# Altium PCB DWM1000Breakout.PcbDoc
Units mil, origin at the board's own origin, x right, y up, seen from the top; angles counter-clockwise.
Board outline 2560 x 1183 mil, 2 copper layers (Component Side, Bottom Layer), stack 61.4 mil thick; 27 components, 39 nets, 128 pads, 24 vias.
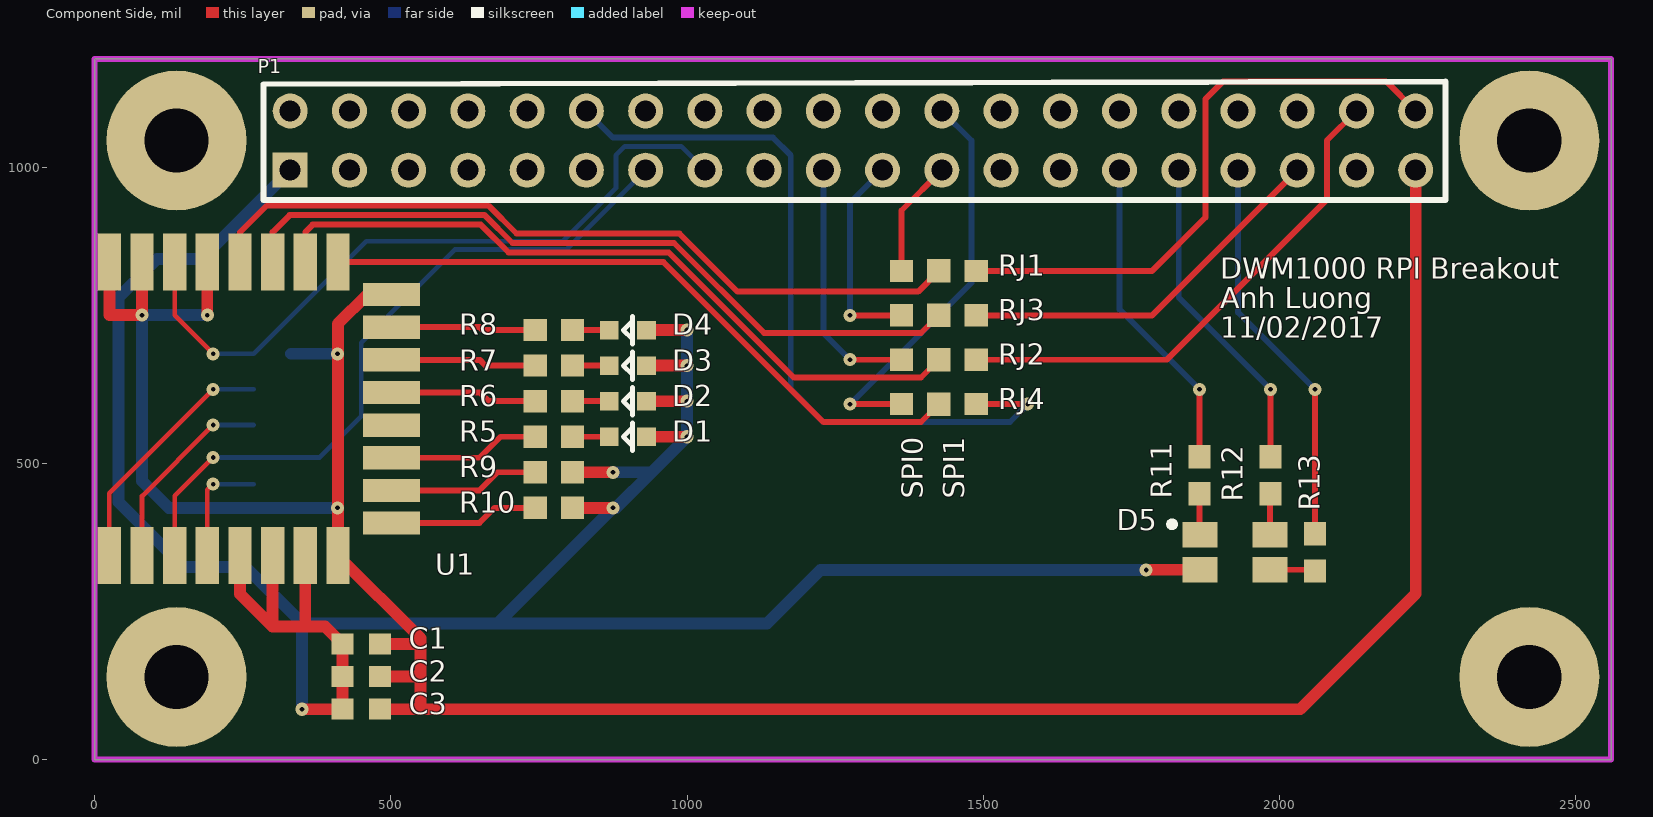
[diagram p0: Component Side view]
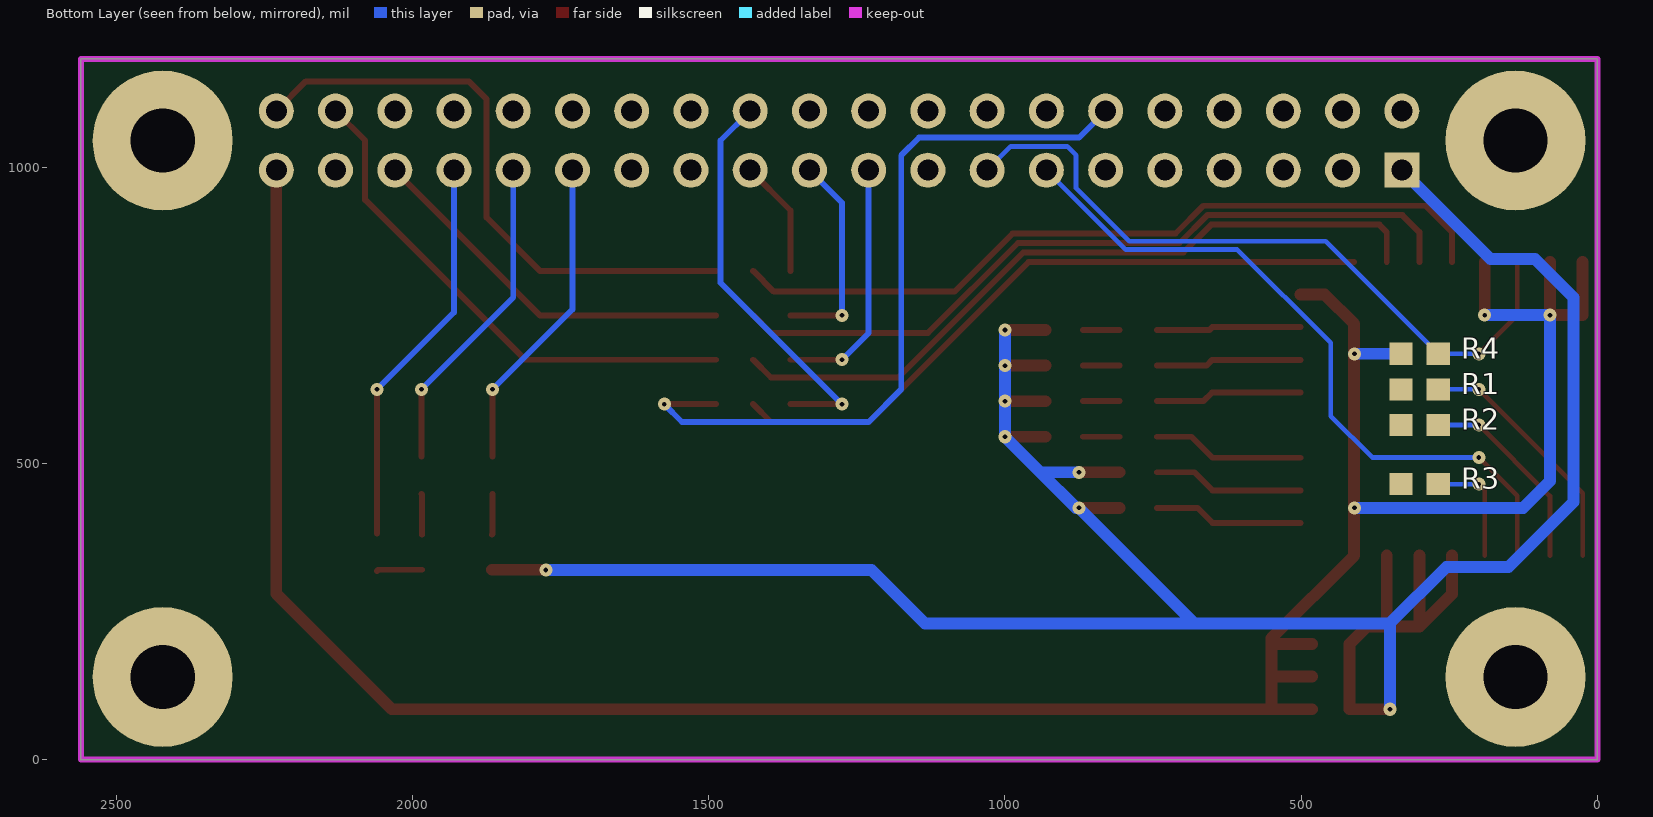
[diagram p1: Bottom Layer view, seen from below]

## Layer stack, top to bottom
Top Solder: solder mask 0.4, Solder Resist, Dk 3.5
Component Side: signal copper 1.7
Dielectric 1: core 58, FR-4, Dk 4.2
Bottom Layer: signal copper 1.7
Solder Side: solder mask 0.4, Solder Resist, Dk 3.5

## Board outline
0,0 0,1183 2560,1183 2560,0

## Design rules (kind name [scope] priority, off if disabled: settings)
Clearance [InNetClass('RF')] p1: gap=20 ignorepadtopadclearanceinfootprint=FALSE
Clearance "Clearance~Sunstone Circuits" [All] p2: gap=6 ignorepadtopadclearanceinfootprint=FALSE except(0: Arc-Hole Track-Hole SMDPad-Hole THPad-Hole Via-Hole Fill-Hole Poly-Hole Region-Hole Text-Hole) // Sunstone Circuits Minimum Clearance Rule (MLB~4&6 Layer Designs)
HoleSize "HoleSize~Sunstone Circuits" [All] p1: absolutevalues=TRUE maxlimit=251 minlimit=8 maxpercent=80.000 minpercent=20.000 // Sunstone Circuits Hole Size Rule (MLB~4&6 Layer Designs)
HoleSize Testpoint [All] p2: absolutevalues=TRUE maxlimit=100 minlimit=1 maxpercent=80.000 minpercent=20.000
HoleSize TestPointUsage [All] p3: absolutevalues=TRUE maxlimit=100 minlimit=1 maxpercent=80.000 minpercent=20.000
MinimumAnnularRing "MinimumAnnularRing~Sunstone Circuits" [All] p1: minimumring=7 // Sunstone Circuits Minimum Annular Ring (MLB~4&6 Layer Designs)
PlaneClearance "PlaneClearance~Sunstone Circuits" [All] p1: clearance=12 // Sunstone Circuits Power Plane Clearance Rule (MLB~4&6 Layer Designs)
PlaneConnect "PlaneConnect~Sunstone Circuits" [All] p1: planeconnectstyle=Relief reliefexpansion=10 reliefentries=4 reliefconductorwidth=8 reliefairgap=10 // Sunstone Circuits Power Plane Connect Rule (MLB~4&6 Layer Designs)
PolygonConnect [IsVia] p1: thpad.connectstyle=Direct thpad.reliefconductorwidth=10 thpad.reliefentries=4 thpad.polygonreliefangle="90 Angle" thpad.airgapwidth=10 smdpad.connectstyle=Relief smdpad.reliefconductorwidth=10 smdpad.reliefentries=4 smdpad.polygonreliefangle="90 Angle" smdpad.airgapwidth=10 via.connectstyle=Direct via.reliefconductorwidth=10 via.reliefentries=4 via.polygonreliefangle="90 Angle" via.airgapwidth=10
PolygonConnect "PolygonConnect~Sunstone Circuits" [All] p2: connectstyle=Relief reliefconductorwidth=8 reliefentries=4 polygonreliefangle="90 Angle" airgapwidth=10 // Sunstone Circuits Polygon Connect Style (MLB~4&6 Layer Designs)
RoomDefinition DWM1000Breakout [InComponentClass('DWM1000Breakout')] p1: confinementstyle=ConfineIn formatcopy=TRUE lockcomponents=FALSE outline -2000,-3000 0,-3000 0,-2000 -2000,-2000
RoutingVias "RoutingVias~Sunstone Circuits" [All] p1: holewidth=16 width=30 viastyle="Through Hole" minholewidth=8 minwidth=22 maxholewidth=20 maxwidth=40 // Sunstone Circuits Routing Vias Rule (MLB~4&6 Layer Designs)
ShortCircuit "ShortCircuit~Sunstone Circuits" [All] p1: allowed=FALSE // Sunstone Circuits Short Circuit Rule~Do Not Allow (MLB~4&6 Layer Designs)
SolderMaskExpansion "SolderMaskExpansion~Sunstone Circuits" [All] p1: expansion=3 // Sunstone Circuits Solder Mask Expansion Rule (MLB~4&6 Layer Designs)
ViasUnderSMD "ViasUnderSMD~Sunstone Circuits" [All] p1: allowed=FALSE // Sunstone Circuits Vias Under SMD~Do Not Allow (MLB~4&6 Layer Designs)
Width [InNetClass('RF')] p1: maxlimit=16.4 minlimit=16.4 preferedwidth=16.4 impedancedriven=TRUE minimp=50.000000 maximp=50.000000 favimp=50.000000
Width "Width~Sunstone Circuits" [All] p2: maxlimit=100 minlimit=6 preferedwidth=10 // Sunstone Circuits Minimum Width Rule (MLB~4&6 Layer Designs)
26 further rules are at their usual default settings.

## Components (designator, comment, footprint, x,y, rotation, side; value= is the part's Value field where it differs from the comment)
C1 "GRM188R60J106ME47D" "CAPC1608X08N (0603)" 450,195 r180 top
C2 "GRM188R61A105KA61D" "CAPC1608X08N (0603)" 450,140 r180 top
C3 "GRM188R71C104KA01D" "CAPC1608X08N (0603)" 450,85 r180 top
D1 "LG Q971-KN-1" CHIPLED0603 900,545 r180 top
D2 "LG Q971-KN-1" CHIPLED0603 900,605 r180 top
D3 "LG Q971-KN-1" CHIPLED0603 900,665 r180 top
D4 "LG Q971-KN-1" CHIPLED0603 900,725 r180 top
D5 "CLV1A-FKB-CJ1M1F1BB7R4S3" "CREE LV1" 1925,350 r0 top
P1 "Raspbery Pi Zero Mate" "Raspberry Pi Zero" 1280,1045 r270 top locked
R1 "MCR03ERTJ000" "RESC1608X06N (0603)" 300,625 r180 bottom
R2 "MCR03ERTJ000" "RESC1608X06N (0603)" 300,565 r180 bottom
R3 "MCR03ERTJ000" "RESC1608X06N (0603)" 300,465 r180 bottom
R4 "MCR03ERTJ103" "RESC1608X06N (0603)" 300,685 r180 bottom
R5 "MCR03ERTJ331" "RESC1608X06N (0603)" 775,545 r180 top
R6 "MCR03ERTJ331" "RESC1608X06N (0603)" 775,605 r180 top
R7 "MCR03ERTJ331" "RESC1608X06N (0603)" 775,665 r180 top
R8 "MCR03ERTJ331" "RESC1608X06N (0603)" 775,725 r180 top
R9 "MCR03ERTJ000" "RESC1608X06N (0603)" 775,485 r0 top
R10 "MCR03ERTJ000" "RESC1608X06N (0603)" 775,425 r0 top
R11 "MCR03ERTJ331" "RESC1608X06N (0603)" 1865,480 r270 top
R12 "MCR03ERTJ331" "RESC1608X06N (0603)" 1985,480 r90 top
R13 "MCR03ERTJ331" "RESC1608X06N (0603)" 2060,350 r90 top
RJ1 "R_J" RJ 1425,825 r0 top value=DNP
RJ2 "R_J" RJ 1425,675 r0 top value=DNP
RJ3 "R_J" RJ 1425,750 r0 top value=DNP
RJ4 "R_J" RJ 1425,600 r0 top value=DNP
U1 "DWM1000" DWM1000 509.02,336.26 r90 top

## Footprints (in the part's own frame and the unit in brackets; to place one, negate y for a bottom-side part, rotate by r counter-clockwise, add the part's x,y. Pads: shape width x height; smd on the part's side, far side on the other; paste and mask are expansions set on the pad)
"CAPC1608X08N (0603)" [mm] "Chip Capacitor, 2-Leads, Body 1.60x0.80mm, IPC Medium Density"
  rect 0.95x0.9 smd: 1(-0.8,0) 2(0.8,0)
  body extent -0.85,-0.45 0.85,0.45, height 0.8
CHIPLED0603 [mm]
  rect 0.8x0.8 smd: 1(-0.8,0) 2(0.8,0)
  silkscreen extent -0.2,-0.6 0.2,0.6, body extent -0.81,-0.4 0.81,0.4, height 0.6
"CREE LV1" [mm]
  rect 1.5x1.1 smd: 1(-1.5,0.75) 2(-1.5,-0.75) 3(1.5,-0.75) 4(1.5,0.75)
  silkscreen extent -2.82,1.08 -2.57,1.32, body extent -1.75,-1.4 1.75,1.4, height 1.9
DWM1000 [mm]
  rect 2.45x1 smd: 1(0.205,12.3) 2(0.205,10.9) 3(0.205,9.5) 4(0.205,8.1) 5(0.205,6.7) 6(0.205,5.3) 7(0.205,3.9) 8(0.205,2.5) 17(12.795,2.5) 18(12.795,3.9) 19(12.795,5.3) 20(12.795,6.7) 21(12.795,8.1) 22(12.795,9.5) 23(12.795,10.9) 24(12.795,12.3)
  rect 1x2.45 smd: 9(1.6,0.205) 10(3,0.205) 11(4.4,0.205) 12(5.8,0.205) 13(7.2,0.205) 14(8.6,0.205) 15(10,0.205) 16(11.4,0.205)
  body extent 0,-0.01 13,22.99, height 2.9
"Raspberry Pi Zero" [mm] "Raspberry Pi Zero Header and Layout"
  round 6 hole 2.75 unplated mask+2: 0(0,29) 0(0,-29) 0(23,29) 0(23,-29)
  rect 1.5x1.5 hole 0.9: 1(1.27,-24.13)
  round 1.5 hole 0.9: 2(-1.27,-24.13) 3(1.27,-21.59) 4(-1.27,-21.59) 5(1.27,-19.05) 6(-1.27,-19.05) 7(1.27,-16.51) 8(-1.27,-16.51) 9(1.27,-13.97) 10(-1.27,-13.97) 11(1.27,-11.43) 12(-1.27,-11.43) 13(1.27,-8.89) 14(-1.27,-8.89) 15(1.27,-6.35) 16(-1.27,-6.35) 17(1.27,-3.81) 18(-1.27,-3.81) 19(1.27,-1.27) 20(-1.27,-1.27) 21(1.27,1.27) 22(-1.27,1.27) 23(1.27,3.81) 24(-1.27,3.81) 25(1.27,6.35) 26(-1.27,6.35) 27(1.27,8.89) 28(-1.27,8.89) 29(1.27,11.43) 30(-1.27,11.43) 31(1.27,13.97) 32(-1.27,13.97) 33(1.27,16.51) 34(-1.27,16.51) 35(1.27,19.05) 36(-1.27,19.05) 37(1.27,21.59) 38(-1.27,21.59) 39(1.27,24.13) 40(-1.27,24.13)
  silkscreen extent -2.54,-25.27 2.54,25.4, body extent -3.6,-32.53 27.65,33.37, height 10.64
"RESC1608X06N (0603)" [mm] "Chip Resistor, 2-Leads, Body 1.60x0.80mm, IPC Medium Density"
  rect 1x0.95 smd: 1(-0.8,0) 2(0.8,0)
  body extent -0.85,-0.45 0.85,0.45, height 0.55
RJ [mm] "0 Ohm Resistor Jumper"
  rect 1x1 smd: 1(0,0)
  rect 1x0.95 smd: 2(-1.6,0) 3(1.6,0)
  round 0.5 on Top Overlay: 5(-2.475,-0.825)
  body extent -1.35,-0.45 1.65,0.45, height 0.55

## Part data
C1: "CAP CER 10UF 6.3V 20% X5R 0603", Capacitance=10µF, Manufacturer="Murata Electronics North America", Operating Temperature="-55°C ~ 85°C", Package / Case="0603 (1608 Metric)", Ratings=-, Temperature Coefficient=X5R, Tolerance=±20%, Voltage - Rated=6.3V, Applications="General Purpose", Category=Capacitors, ComponentLink1Description=http://search.murata.co.jp/Ceramy/image/img/A01X/G101/ENG/GRM188R60J106ME47-01.pdf, ComponentLink1URL=http://search.murata.co.jp/Ceramy/image/img/A01X/G101/ENG/GRM188R60J106ME47-01.pdf, Features=-, Height - Seated (Max)=-, Lead Spacing=-, Lead Style=-, Manufacturer Part Number=GRM188R60J106ME47D, Mounting Type="Surface Mount, MLCC", Packaging=Digi-Reel®, Pricing 1="1=0.24, 10=0.2, 50=0.1126, 100=0.1, 250=0.075, 500=0.06626, 1000=0.05875 (USD)", RoHS="RoHS Compliant", Size / Dimension="0.063\" L x 0.031\" W (1.60mm x 0.80mm)", Stock 1=2128324, Supplier 1=Digi-Key, Supplier 2=Digi-Key, Thickness (Max)="0.035\" (0.90mm)"
C2: "CAP CER 1UF 10V 10% X5R 0603", Capacitance=1.0µF, Manufacturer="Murata Electronics North America", Operating Temperature="-55°C ~ 85°C", Package / Case="0603 (1608 Metric)", Ratings=-, Temperature Coefficient=X5R, Tolerance=±10%, Voltage - Rated=10V, Applications="General Purpose", Category=Capacitors, ComponentLink1Description=http://search.murata.co.jp/Ceramy/image/img/A01X/G101/ENG/GRM188R61A105KA61-01.pdf, ComponentLink1URL=http://search.murata.co.jp/Ceramy/image/img/A01X/G101/ENG/GRM188R61A105KA61-01.pdf, Features=-, Height - Seated (Max)=-, Lead Spacing=-, Lead Style=-, Manufacturer Part Number=GRM188R61A105KA61D, Mounting Type="Surface Mount, MLCC", Packaging="Cut Tape (CT)", Pricing 1="1=0.1, 10=0.041, 50=0.0224, 100=0.019, 250=0.01552, 500=0.01328, 1000=0.01035 (USD)", RoHS="RoHS Compliant", Size / Dimension="0.063\" L x 0.031\" W (1.60mm x 0.80mm)", Stock 1=244919, Supplier 1=Digi-Key, Thickness (Max)="0.035\" (0.90mm)"
C3: "CAP CER 0.1UF 16V 10% X7R 0603", Capacitance=0.1µF, Manufacturer="Murata Electronics North America", Operating Temperature="-55°C ~ 125°C", Package / Case="0603 (1608 Metric)", Ratings=-, Temperature Coefficient=X7R, Tolerance=±10%, Voltage - Rated=16V, Applications="General Purpose", Category=Capacitors, ComponentLink1Description=http://search.murata.co.jp/Ceramy/image/img/A01X/G101/ENG/GRM188R71C104KA01-01.pdf, ComponentLink1URL=http://search.murata.co.jp/Ceramy/image/img/A01X/G101/ENG/GRM188R71C104KA01-01.pdf, Features=-, Height - Seated (Max)=-, Lead Spacing=-, Lead Style=-, Manufacturer Part Number=GRM188R71C104KA01D, Mounting Type="Surface Mount, MLCC", Packaging="Cut Tape (CT)", Pricing 1="1=0.1, 10=0.019, 50=0.0102, 100=0.0086, 250=0.00704, 500=0.006, 1000=0.00468 (USD)", RoHS="RoHS Compliant", Size / Dimension="0.063\" L x 0.031\" W (1.60mm x 0.80mm)", Stock 1=1458181, Supplier 1=Digi-Key, Thickness (Max)="0.035\" (0.90mm)"
D1 D2 D3 D4: "LED CHIPLED 570NM GREEN 0603 SMD", Color=Green, Current - Test=20mA, Luminous Flux @ Current - Test=-, Manufacturer="OSRAM Opto Semiconductors Inc", Millicandela Rating=10mcd, Package / Case="0603 (1608 Metric)", Voltage - Forward (Vf) Typ=2.2V, Category=Optoelectronics, ComponentLink1Description=http://catalog.osram-os.com/catalogue/catalogue.do;jsessionid=DE4D071D0D2758CC117C711BF848053E?act=downloadFile&favOid=0200000600005069000100b6, ComponentLink1URL=http://catalog.osram-os.com/catalogue/catalogue.do;jsessionid=DE4D071D0D2758CC117C711BF848053E?act=downloadFile&favOid=0200000600005069000100b6, Height=0.80mm, Lens Style/Size="Rectangle with Flat Top, 1mm x 0.8mm", Lens Type=Diffused, Manufacturer Part Number="LG Q971-KN-1", Mounting Type="Surface Mount", Packaging="Tape & Reel (TR)", Pricing 1="4000=0.03632 (USD)", RoHS="RoHS Compliant", Size / Dimension="1.60mm L x 0.80mm W", Stock 1=44000, Supplier 1=Digi-Key, Viewing Angle=160°, Wavelength - Dominant=570nm, Wavelength - Peak=572nm
D5: "LED RED/GREEN/BLUE PLCC4 SMD", Color="Red, Green, Blue (RGB)", Current - Test=20mA, Luminous Flux @ Current - Test=-, Manufacturer="Cree Inc", Millicandela Rating="675mcd Red, 1055mcd Green, 337mcd Blue", Package / Case=4-PLCC, Voltage - Forward (Vf) (Typ)="2V Red, 3.2V Green, 3.2V Blue", Category=Optoelectronics, ComponentLink1Description=http://www.cree.com/~/media/Files/Cree/LED%20Components%20and%20Modules/HB/Data%20Sheets/CLV1AFKB(874).pdf, ComponentLink1URL=http://www.cree.com/~/media/Files/Cree/LED%20Components%20and%20Modules/HB/Data%20Sheets/CLV1AFKB(874).pdf, Height=2.10mm, Lens Style/Size="Round with Flat Top, 2.2mm", Lens Type="Diffused, White", Manufacturer Part Number=CLV1A-FKB-CJ1M1F1BB7R4S3, Mounting Type="Surface Mount", Packaging="Tape & Reel (TR)", Pricing 1="2000=0.354, 50000=0.329, 100000=0.307 (USD)", RoHS="RoHS Compliant", Size / Dimension="3.20mm L x 2.80mm W", Stock 1=254000, Supplier 1=Digi-Key, Viewing Angle=120°, Wavelength - Dominant="621.5nm, 530nm, 472.5nm", Wavelength - Peak="630nm, 527nm, 470nm"
P1: library part "Raspberry Pi Zero Mate", "The header and mechanical drawings for connnecting a Raspbery Pi Zero"
R1 R2 R3 R9 R10: "RES 0.0 OHM 1/10W JUMP 0603 SMD", Manufacturer="Rohm Semiconductor", Package / Case="0603 (1608 Metric)", Power (Watts)="0.1W, 1/10W", Resistance (Ohms)=0.0, Temperature Coefficient=-, Tolerance=Jumper, Category=Resistors, ComponentLink1Description=http://rohmfs.rohm.com/en/products/databook/datasheet/passive/resistor/chip_resistor/mcr_g.pdf, ComponentLink1URL=http://rohmfs.rohm.com/en/products/databook/datasheet/passive/resistor/chip_resistor/mcr_g.pdf, Composition="Thick Film", Features=-, Height="0.022\" (0.55mm)", Manufacturer Part Number=MCR03ERTJ000, Number of Terminations=2, Packaging="Cut Tape (CT)", Pricing 1="1=0.1, 25=0.0064, 100=0.0035, 250=0.00268, 500=0.00214, 1000=0.00157 (USD)", RoHS="RoHS Compliant", Size / Dimension="0.063\" L x 0.031\" W (1.60mm x 0.80mm)", Stock 1=127296, Supplier 1=Digi-Key, Supplier Device Package="0603 (1608 Metric)"
R4: "RES 10K OHM 1/10W 5% 0603 SMD", Manufacturer="Rohm Semiconductor", Package / Case="0603 (1608 Metric)", Power (Watts)="0.1W, 1/10W", Resistance (Ohms)=10k, Temperature Coefficient=±200ppm/°C, Tolerance=±5%, Category=Resistors, ComponentLink1Description=http://rohmfs.rohm.com/en/products/databook/datasheet/passive/resistor/chip_resistor/mcr_g.pdf, ComponentLink1URL=http://rohmfs.rohm.com/en/products/databook/datasheet/passive/resistor/chip_resistor/mcr_g.pdf, Composition="Thick Film", Features=-, Height="0.022\" (0.55mm)", Manufacturer Part Number=MCR03ERTJ103, Number of Terminations=2, Packaging="Tape & Reel (TR)", Pricing 1="5000=0.00103, 10000=0.00089, 25000=0.00078, 50000=0.00072, 125000=0.0007 (USD)", RoHS="RoHS Compliant", Size / Dimension="0.063\" L x 0.031\" W (1.60mm x 0.80mm)", Stock 1=330000, Supplier 1=Digi-Key, Supplier Device Package="0603 (1608 Metric)"
R5 R6 R7 R8 R11 R12 R13: "RES 330 OHM 1/10W 5% 0603 SMD", Manufacturer="Rohm Semiconductor", Package / Case="0603 (1608 Metric)", Power (Watts)="0.1W, 1/10W", Resistance (Ohms)=330, Temperature Coefficient=±200ppm/°C, Tolerance=±5%, Category=Resistors, ComponentLink1Description=http://rohmfs.rohm.com/en/products/databook/datasheet/passive/resistor/chip_resistor/mcr_g.pdf, ComponentLink1URL=http://rohmfs.rohm.com/en/products/databook/datasheet/passive/resistor/chip_resistor/mcr_g.pdf, Composition="Thick Film", Features=-, Height="0.022\" (0.55mm)", Manufacturer Part Number=MCR03ERTJ331, Number of Terminations=2, Packaging=Digi-Reel®, Pricing 1="1=0.1, 10=0.013, 25=0.0092, 100=0.0052, 250=0.00396, 500=0.00316, 1000=0.00233 (USD)", RoHS="RoHS Compliant", Size / Dimension="0.063\" L x 0.031\" W (1.60mm x 0.80mm)", Stock 1=12878, Supplier 1=Digi-Key, Supplier Device Package="0603 (1608 Metric)"
RJ1 RJ2 RJ3 RJ4: "Resistor Jumper", Package / Case="0603 (1608 Metric)", Applications="General Purpose", Mounting Type="Surface Mount, MLCC"
U1: "MOD IEEE802.15.4-2011 UWB TXRX", Current - Receiving=64mA, Current - Transmitting=31mA, Frequency="3.5GHz ~ 6.5GHz", Manufacturer="Decawave Limited", Operating Temperature="-40°C ~ 85°C", Package / Case=Module, Power - Output=-, Supplier Part Number 1=1479-1002-1-ND, Voltage - Supply="2.8 V ~ 3.6 V", Antenna Type="Integrated, Chip", Category="RF/IF and RFID", ComponentLink1Description=http://www.decawave.com/sites/default/files/product-pdf/dwm1000-product-brief.pdf, ComponentLink1URL=http://www.decawave.com/sites/default/files/product-pdf/dwm1000-product-brief.pdf, Data Rate=6.8Mbps, Manufacturer Part Number=DWM1000, Memory Size=-, Modulation=-, Mounting Type="Surface Mount", Packaging="Cut Tape (CT)", Pricing 1="1=32.16, 10=26.704, 100=24.24, 250=22.51296 (USD)", Protocol=-, RF Family/Standard=802.15.4, RoHS="RoHS Compliant", Sensitivity=-, Serial Interfaces=SPI, Stock 1=1028, Supplier 1=Digi-Key

## Via types
v1: diameter 22, hole 8, Component Side to Bottom Layer, tented both sides, 24 vias

## Nets (pads, with @x,y where several pads share a name; then routed paths per layer and width w, separated by ;. In a path a pad name is that pad's centre, name@x,y a point inside that pad or via, vN(x,y) a via of type N, cw(c..) or ccw(c..) an arc to the next point about the centre after c; other vN are vias at no path point)
3V3: C1.2 C2.2 C3.2 D1.1 D2.1 D3.1 D4.1 D5.2 P1.1 R9.2 R10.2 U1.5 U1.6 U1.7 | length 4614.7
  Component Side w20: U1.5 245.24,279.76 300.35,224.65 ; U1.6 300.35,224.65 ; v1(350,85) C3.2 C2.2 C1.2 388.86,224.65 355.47,224.65 ; U1.7 355.47,224.65 ; R10.2 v1(875,425) ; R9.2 v1(875,485) ; D1.1 v1(1000,545) ; D2.1 v1(1000,605) ; D3.1 v1(1000,665) ; D4.1 v1(1000,725) ; v1(1775,320) 1775.47,320.47 D5.2 ; 300.35,224.65 355.47,224.65
  Bottom Layer w20: P1.1 180,845 105,845 40,780 40,435 150,325 255,325 350,230 ; v1(350,85) 350,230 ; v1(875,485) 940,485 ; v1(1000,725) v1(1000,665) v1(1000,605) v1(1000,545) 940,485 ; v1(1775,320) 1225,320 1135,230 680,230 ; 350,230 680,230 ; 680,230 v1(875,425) 880,425 940,485
BLUE: P1.33 R13.2 | length 667.4
  Component Side w10: R13.2 v1(2060,625)
  Bottom Layer w10: P1.33 1930,755 v1(2060,625)
EXTON: R1.1
GND: C1.1 C2.1 C3.1 P1.39 R4.1 U1.8 U1.16 U1.21 U1.23 U1.24 | length 4642.5
  Component Side w20: U1.24 24.76,750.24 v1(79.88,750.24) U1.23 ; v1(190.12,750.24) U1.21 ; C3.1 550,85 ; C2.1 550,140 ; C1.1 550,195 ; U1.16 460.08,785.08 410.59,735.59 410.59,685 U1.8 550,204.92 550,195 ; P1.39 2230,280 2035,85 550,85 ; 550,85 550,140 ; 550,140 550,195
  Bottom Layer w20: v1(190.12,750.24) v1(79.88,750.24) 79.88,470.12 125,425 v1(410,425) ; R4.1 v1(410,685)
GPIO3: U1.12
GREEN: P1.31 R12.2 | length 547.7
  Component Side w10: R12.2 v1(1985,625)
  Bottom Layer w10: P1.31 1830,780 v1(1985,625)
IRQ: P1.15 R4.2 U1.22 | length 1205.8
  Component Side w8: U1.22 135,750 v1(200,685)
  Bottom Layer w8: v1(200,685) R4.2 458.5,875 790.2,875 880,964.8 880,1020 895,1035 990,1035 P1.15
NetD1_2: D1.2 R5.1 | length 62
  Component Side w10: R5.1 D1.2
NetD2_2: D2.2 R6.1 | length 62
  Component Side w10: R6.1 D2.2
NetD3_2: D3.2 R7.1 | length 62
  Component Side w10: R7.1 D3.2
NetD4_2: D4.2 R8.1 | length 62
  Component Side w10: R8.1 D4.2
NetD5_1: D5.1 R11.2 | length 69.4
  Component Side w10: R11.2 1865,380.47 D5.1
NetD5_3: D5.3 R13.1 | length 76.8
  Component Side w10: D5.3 2058.03,320.47 R13.1
NetD5_4: D5.4 R12.1 | length 69.4
  Component Side w10: D5.4 1984.06,447.56 R12.1
NetR1_2: R1.2 U1.1 | length 421.8
  Component Side w8: U1.1 24.76,449.76 v1(200,625)
  Bottom Layer w8: v1(200,625) R1.2
NetR2_2: R2.2 U1.2 | length 338.9
  Component Side w8: U1.2 79.88,444.88 v1(200,565)
  Bottom Layer w8: v1(200,565) R2.2
NetR3_2: R3.2 U1.4 | length 193.3
  Component Side w8: U1.4 190.12,455.12 v1(200,465)
  Bottom Layer w8: v1(200,465) R3.2
NetR5_2: R5.2 U1.11 | length 257.3
  Component Side w10: U1.11 649.49,509.49 685,545 R5.2
NetR6_2: R6.2 U1.13 | length 248.7
  Component Side w10: U1.13 650.28,619.72 665,605 R6.2
NetR7_2: R7.2 U1.14 | length 246.6
  Component Side w10: U1.14 650,674.84 659.84,665 R7.2
NetR8_2: R8.2 U1.15 | length 244.6
  Component Side w10: U1.15 650,729.96 654.96,725 R8.2
NetR9_1: R9.1 U1.10 | length 255.2
  Component Side w10: U1.10 649.37,454.37 680,485 R9.1
NetR10_1: R10.1 U1.9 | length 253.2
  Component Side w10: U1.9 649.25,399.25 675,425 R10.1
RED: P1.29 R11.1 | length 539.4
  Component Side w10: R11.1 v1(1865,625)
  Bottom Layer w10: P1.29 1730,760 v1(1865,625)
RESET: P1.13 U1.3 | length 1195.7
  Component Side w8: U1.3 135,445 v1(200,510)
  Bottom Layer w8: v1(200,510) 380,510 450,580 450,703.28 607.72,861 796,861 P1.13
SPI0_CS_EX: P1.24 RJ4.2 | length 687.6
  Component Side w10: v1(1275,600) RJ4.2
  Bottom Layer w10: v1(1275,600) 1480,805 1480,1045 P1.24
SPI0_MISO: P1.21 RJ3.2 | length 354.8
  Component Side w10: v1(1275,750) RJ3.2
  Bottom Layer w10: v1(1275,750) 1275,940 P1.21
SPI0_MOSI: P1.19 RJ2.2 | length 425.6
  Component Side w10: v1(1275,675) RJ2.2
  Bottom Layer w10: P1.19 1230,720 v1(1275,675)
SPI0_SCK: P1.23 RJ1.2 | length 198.2
  Component Side w10: RJ1.2 1362.01,927.01 P1.23
SPI1_CS_EX: P1.12 RJ4.3 | length 1293.3
  Component Side w10: RJ4.3 v1(1575,600)
  Bottom Layer w10: P1.12 875,1050 1145,1050 1175,1020 1175,625 1230,570 1545,570 v1(1575,600)
SPI1_MISO: P1.35 RJ3.3 | length 643.5
  Component Side w10: RJ3.3 1785,750 P1.35
SPI1_MOSI: P1.38 RJ2.3 | length 874.6
  Component Side w10: RJ2.3 1810,675 2080,945 2080,1045 P1.38
SPI1_SCK: P1.40 RJ1.3 | length 1012.4
  Component Side w10: RJ1.3 1785,825 1875,915 1875,1115 1905,1145 2180,1145 P1.40
SPI_CS_EX: RJ4.1 U1.17 | length 1138.7
  Component Side w10: U1.17 960,840 1230,570 1395,570 RJ4.1
SPI_MISO: RJ3.1 U1.19 | length 1281.7
  Component Side w10: U1.19 300.35,890.35 329,919 658.37,919 705.37,872 978,872 1130,720 1395,720 RJ3.1
SPI_MOSI: RJ2.1 U1.18 | length 1244.5
  Component Side w10: U1.18 355.47,890.47 368,903 651.75,903 698.75,856 969,856 1180,645 1395,645 RJ2.1
SPI_SCK: RJ1.1 U1.20 | length 1323.1
  Component Side w10: U1.20 245.24,890.24 290,935 665,935 712,888 987,888 1085,790 1390,790 RJ1.1
SYNC: R3.1
WAKEUP: R2.1
pads on no net: P1.0 P1.2 P1.3 P1.4 P1.5 P1.6 P1.7 P1.8 P1.9 P1.10 P1.11 P1.14 P1.16 P1.17 P1.18 P1.20 P1.22 P1.25 P1.26 P1.27 P1.28 P1.30 P1.32 P1.34 P1.36 P1.37 RJ1.5 RJ2.5 RJ3.5 RJ4.5

## Keep-outs
Keep-Out Layer:
  the board outline again, w10

## Silkscreen, mask and mechanical layers (free items; w line width, h text height)
Top Overlay:
  text "DWM1000 RPI Breakout" at 1900,800 h60
  text "Anh Luong" at 1900,750 h60
  text "11/02/2017" at 1900,700 h60
  text "SPI0" at 1410,440 h60 r90
  text "SPI1" at 1480,440 h60 r90
Mechanical 3:
  the board outline again, w10

## Dimensions
0,0 to 2560,0 on Mechanical 15
0,0 to 0,1183 on Mechanical 15

## Text inside footprints (layer, text, board x,y; h text height)
P1: Mechanical 1 "SD Card" at 22.73,871.13 h59.06 r270; Mechanical 1 "HDMI" at 346.31,23.85 h78.74; Mechanical 1 "USB" at 1548.63,23.03 h59.06; Mechanical 1 "USB" at 2050.86,20 h59.06